# Altium PCB RC_Receive_PCB.PcbDoc
Units mm, origin at the board's own origin, x right, y up, seen from the top; angles counter-clockwise.
Board outline 100 x 120 mm, 2 copper layers (Top Layer, Bottom Layer); 88 components, 93 nets, 306 pads, 54 vias.
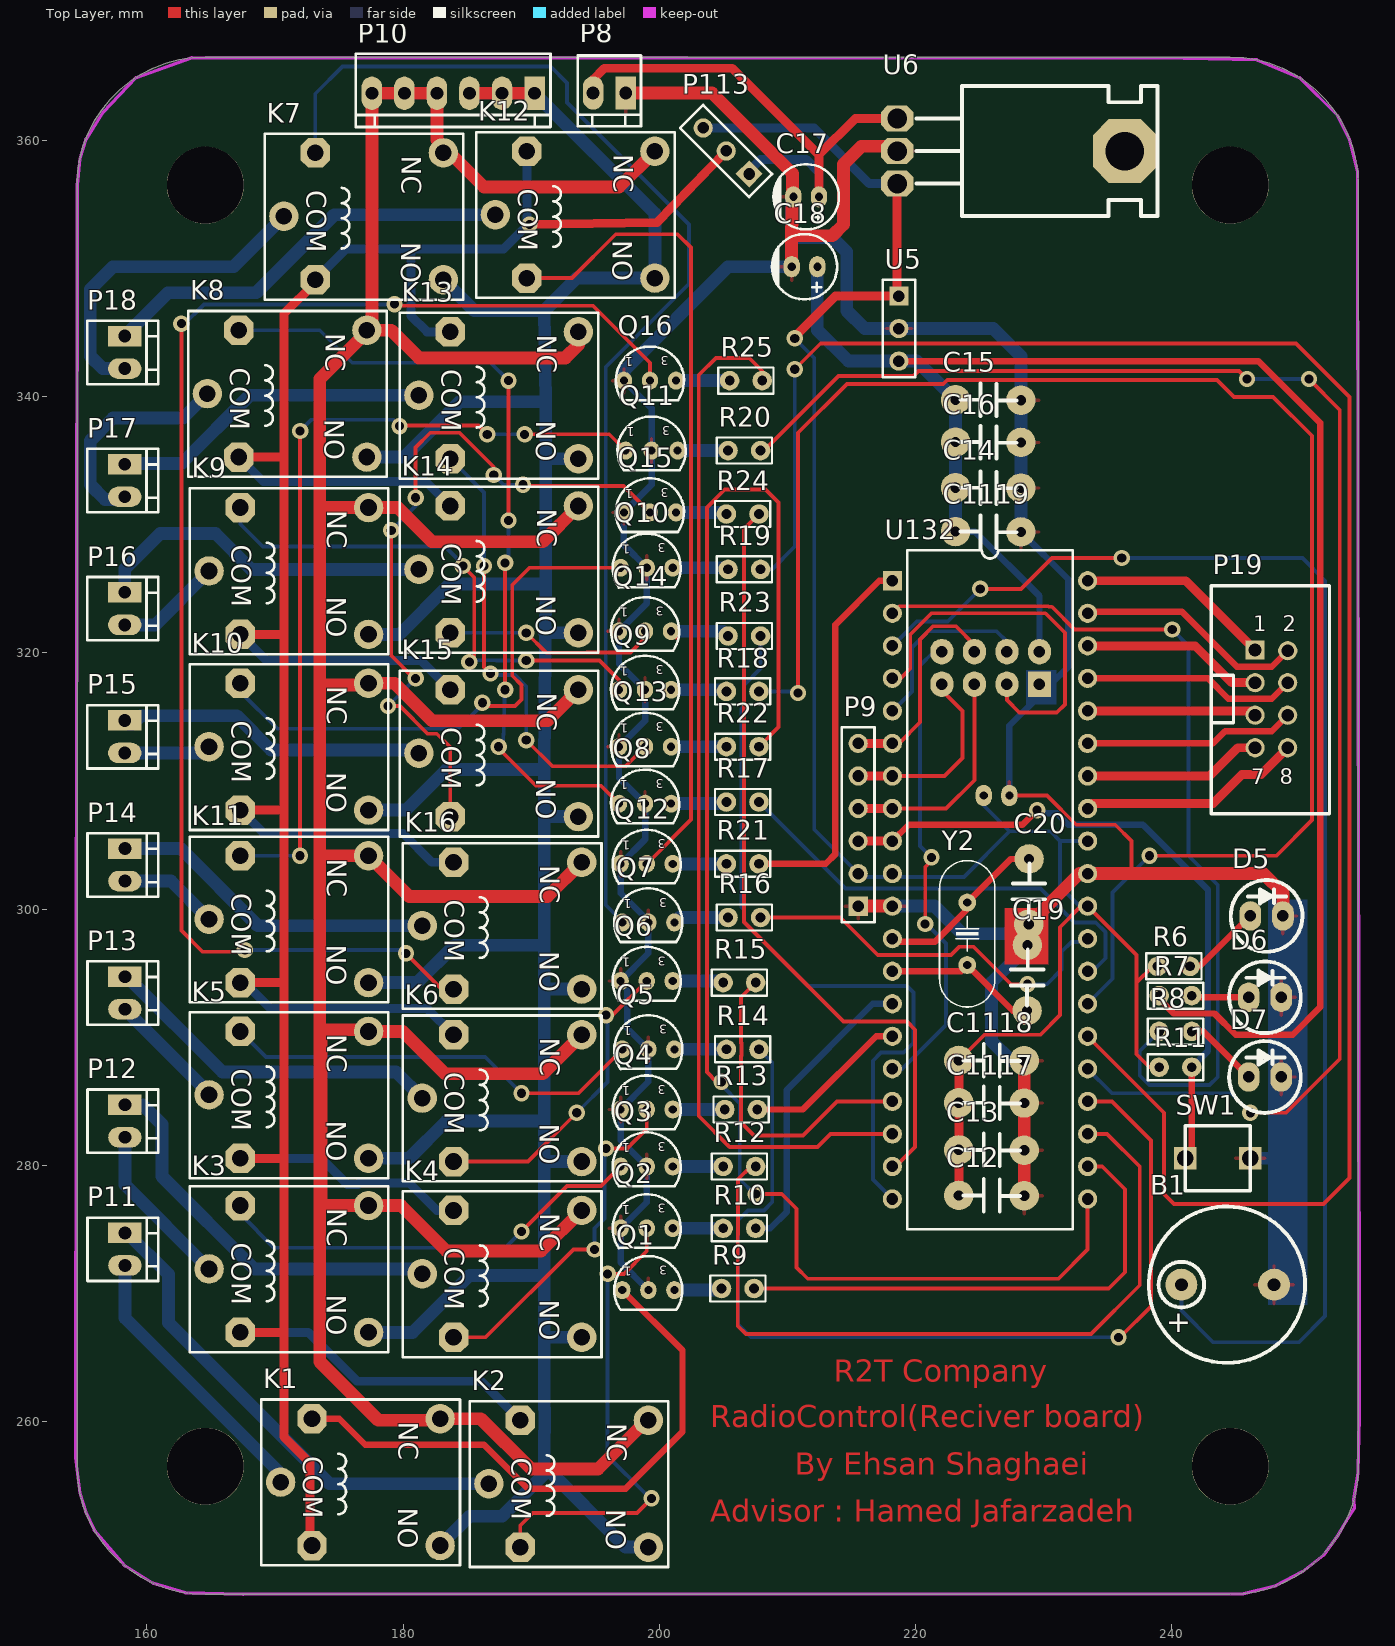
[diagram p0: Top Layer view]
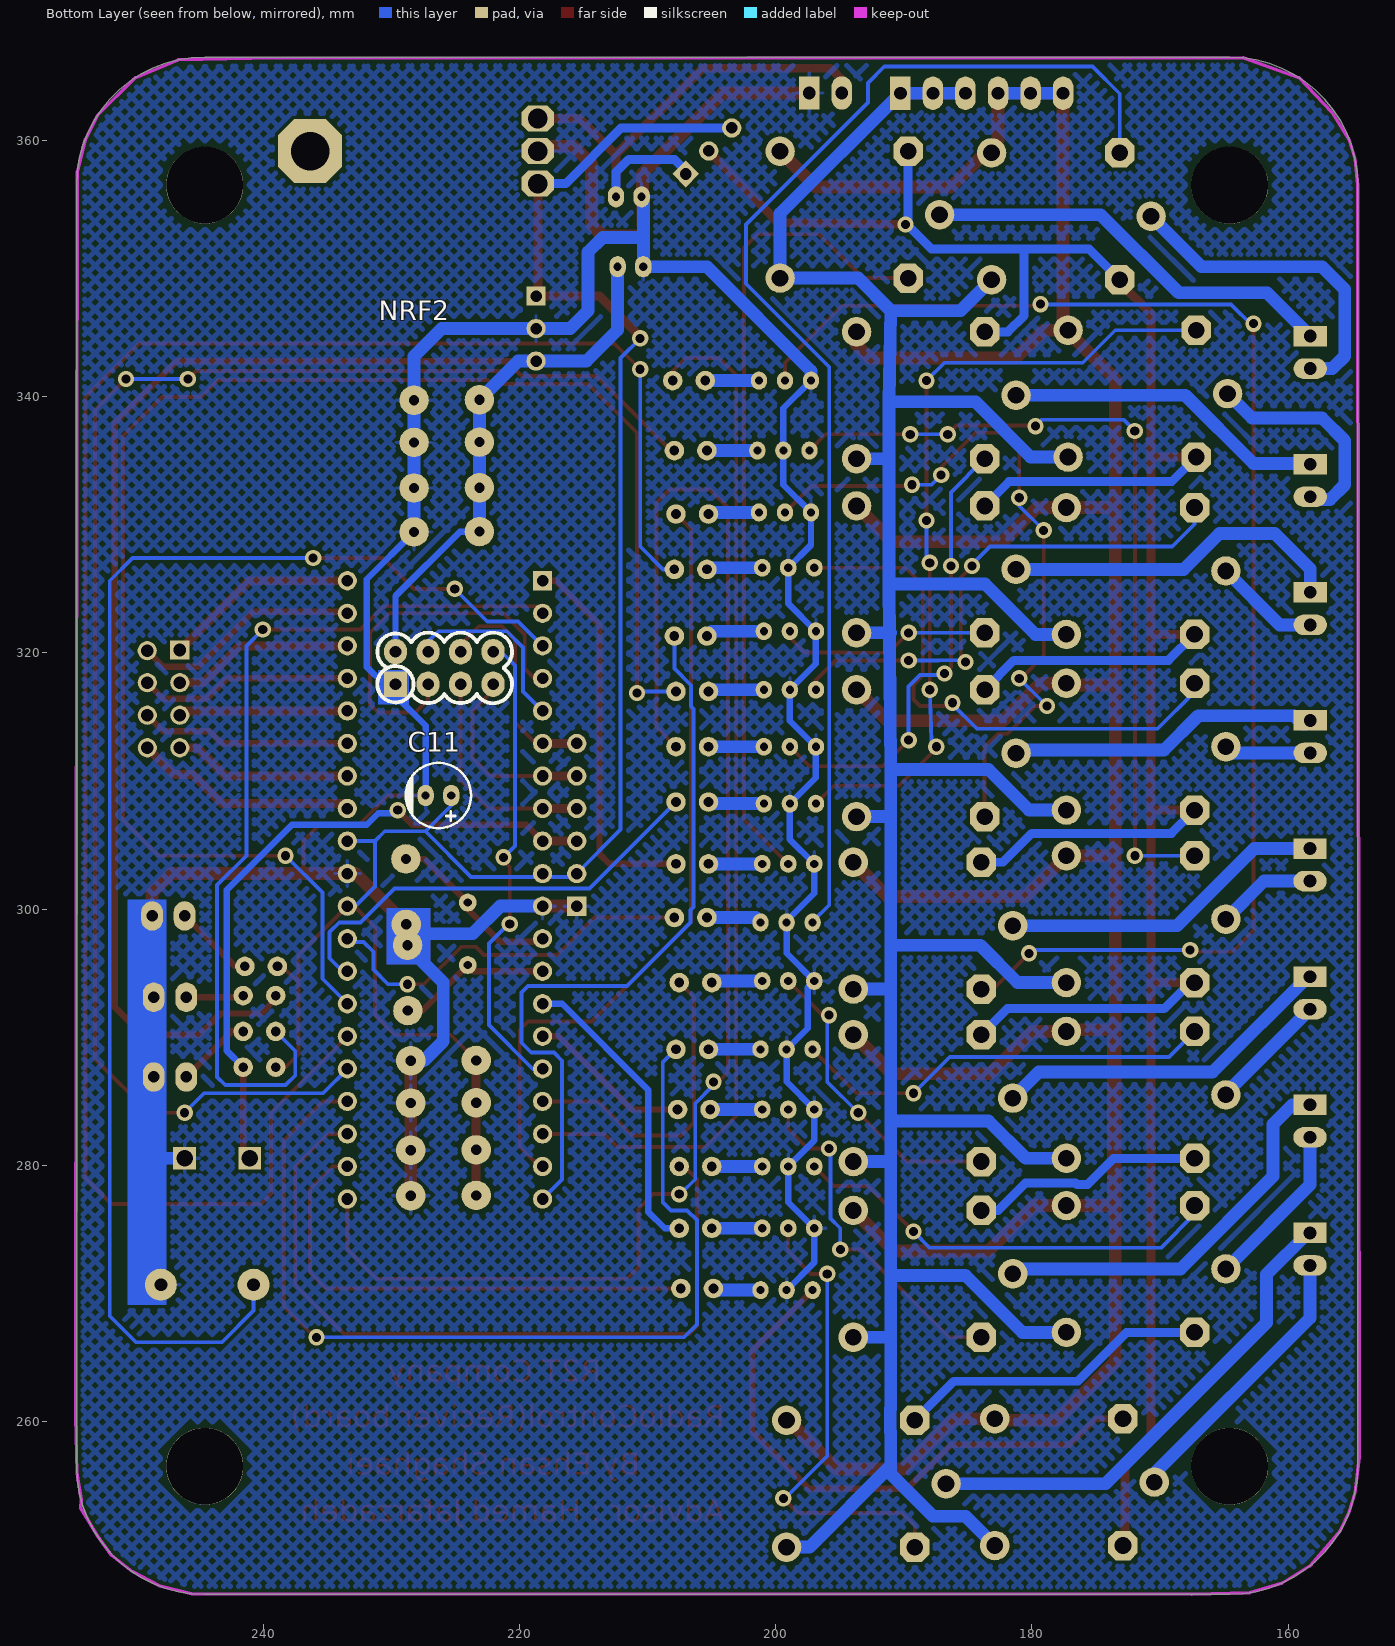
[diagram p1: Bottom Layer view, seen from below]
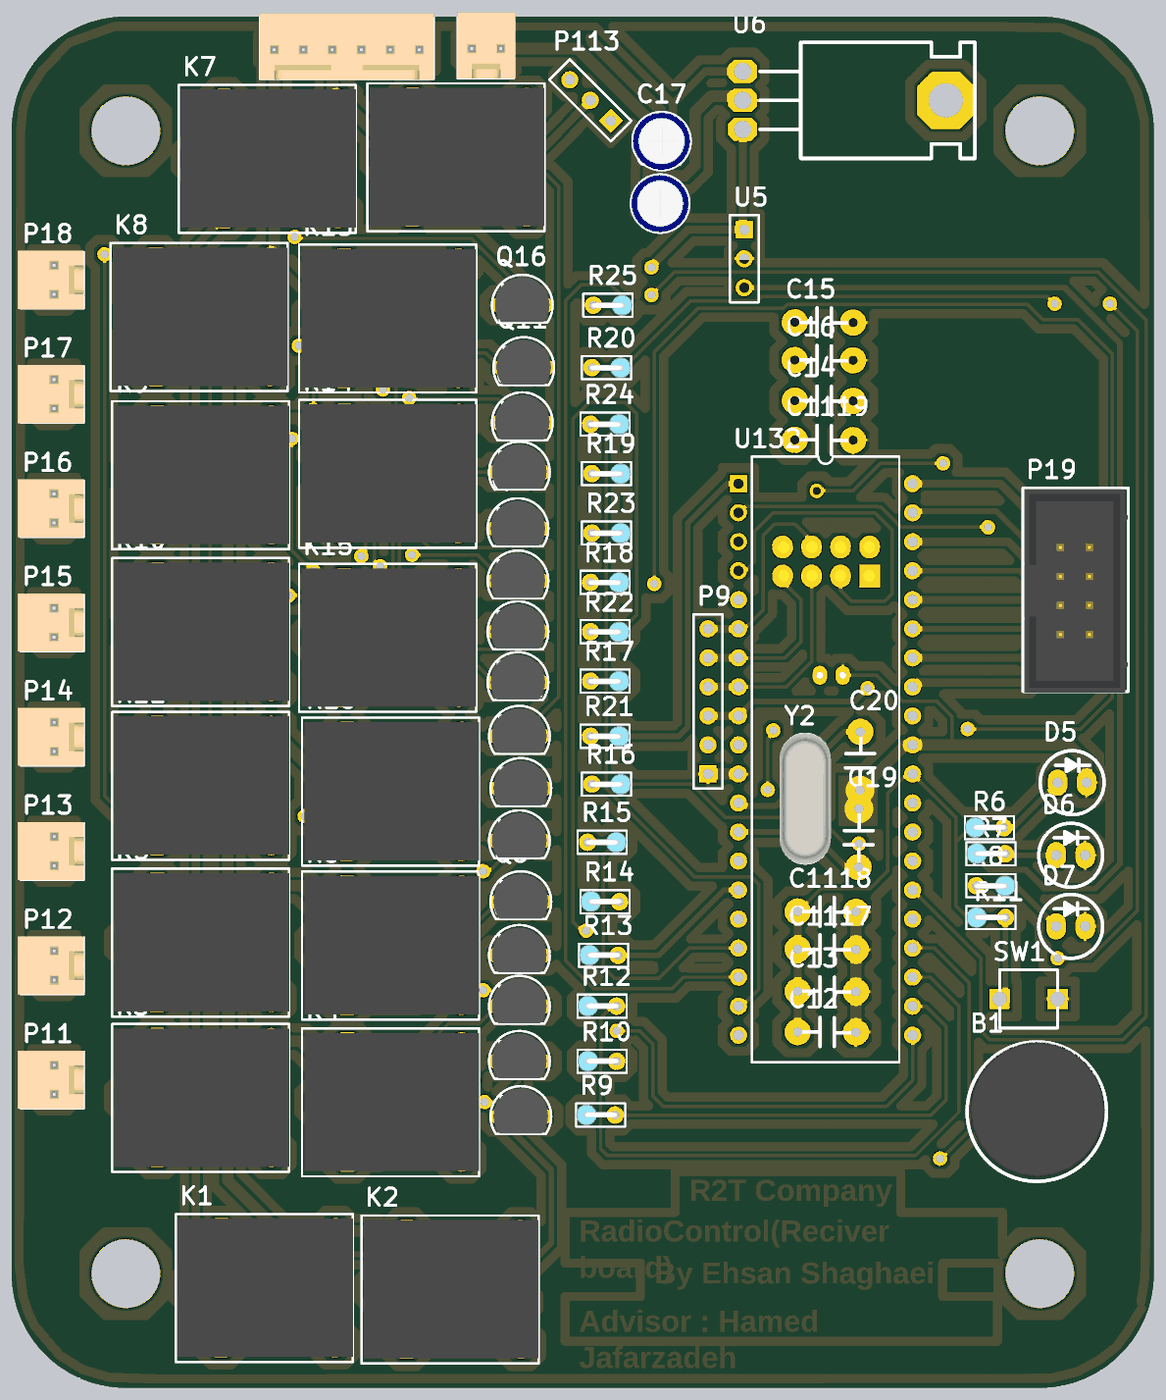
[diagram p2: 3D render of the assembled board from above, using the file's embedded part models]

## Layer stack, top to bottom
Top Solder: solder mask 0.0102, Solder Resist, Dk 3.5
Top Layer: signal copper 0.0356
Dielectric 1: dielectric 0.32, FR-4, Dk 4.8
Bottom Layer: signal copper 0.0356
Bottom Solder: solder mask 0.0102, Solder Resist, Dk 3.5

## Board outline
254.554,356.507 254.499,357.552 254.335,358.586 254.065,359.597 253.689,360.574 253.214,361.507 252.644,362.384 251.985,363.198 251.245,363.938 250.432,364.597 249.554,365.167 248.621,365.642 247.644,366.017 246.633,366.288 245.599,366.452 244.554,366.507 164.554,366.507 163.509,366.452 162.475,366.288 161.464,366.017 160.487,365.642 159.554,365.167 158.676,364.597 157.863,363.938 157.123,363.198 156.464,362.384 155.894,361.507 155.419,360.574 155.043,359.597 154.773,358.586 154.609,357.552 154.554,356.507 154.554,256.507 154.609,255.461 154.773,254.427 155.043,253.416 155.419,252.439 155.894,251.507 156.464,250.629 157.123,249.815 157.863,249.075 158.676,248.416 159.554,247.846 160.487,247.371 161.464,246.996 162.475,246.725 163.509,246.561 164.554,246.507 244.554,246.507 245.599,246.561 246.633,246.725 247.644,246.996 248.621,247.371 249.554,247.846 250.432,248.416 251.245,249.075 251.985,249.815 252.644,250.629 253.214,251.507 253.689,252.439 254.065,253.416 254.335,254.427 254.499,255.461 254.554,256.507

## Design rules (kind name [scope] priority, off if disabled: settings)
Clearance [All] p1: gap=0.254
PolygonConnect [All] p1: connectstyle=Relief reliefconductorwidth=0.254 reliefentries=4 polygonreliefangle="90 Angle" airgapwidth=0.254
RoutingVias [All] p1: holewidth=0.711 width=1.27 viastyle="Through Hole" minholewidth=0.711 minwidth=1.27 maxholewidth=0.711 maxwidth=1.27
SolderMaskExpansion [All] p1: expansion=0.102
Width [All] p1: maxlimit=1 minlimit=0.2 preferedwidth=0.5
29 further rules are at their usual default settings.

## Components (designator, comment, footprint, x,y, rotation, side; value= is the part's Value field where it differs from the comment)
B1 "Buzzer" Buzzer 244.602,270.383 r180 top
C11 "Value" "cap 01" 226.314,308.864 r180 bottom
C12 "CAP" RAD_ADA 228.473,277.622 r180 top
C13 "CAP" RAD_ADA 228.473,281.178 r180 top
C14 "CAP" RAD_ADA 228.219,332.867 r180 top
C15 "CAP" RAD_ADA 228.219,339.725 r180 top
C16 "CAP" RAD_ADA 228.219,336.423 r180 top
C17 "1uF" "cap 01" 211.455,355.6 r0 top
C18 "1uF" "cap 01" 211.328,350.139 r0 top
C19 "CAP" RAD_ADA 228.727,297.18 r270 top
C20 "CAP" RAD_ADA 228.854,303.911 r270 top
C1117 "CAP" RAD_ADA 228.473,284.861 r180 top
C1118 "CAP" RAD_ADA 228.473,288.163 r180 top
C1119 "CAP" RAD_ADA 228.219,329.438 r180 top
D5 "LED" LED_5MM 246.126,299.466 r180 top
D6 "LED" LED_5MM 245.999,293.116 r180 top
D7 "LED" LED_5MM 245.999,286.893 r180 top
K1 "Relay" "Relay 15.40x12.10x13.10" 170.434,255.27 r270 top
K2 "Relay" "Relay 15.40x12.10x13.10" 186.69,255.143 r270 top
K3 "Relay" "Relay 15.40x12.10x13.10" 164.846,271.907 r270 top
K4 "Relay" "Relay 15.40x12.10x13.10" 181.483,271.526 r270 top
K5 "Relay" "Relay 15.40x12.10x13.10" 164.846,285.496 r270 top
K6 "Relay" "Relay 15.40x12.10x13.10" 181.483,285.242 r270 top
K7 "Relay" "Relay 15.40x12.10x13.10" 170.688,354.076 r270 top
K8 "Relay" "Relay 15.40x12.10x13.10" 164.719,340.233 r270 top
K9 "Relay" "Relay 15.40x12.10x13.10" 164.846,326.39 r270 top
K10 "Relay" "Relay 15.40x12.10x13.10" 164.846,312.674 r270 top
K11 "Relay" "Relay 15.40x12.10x13.10" 164.846,299.212 r270 top
K12 "Relay" "Relay 15.40x12.10x13.10" 187.198,354.203 r270 top
K13 "Relay" "Relay 15.40x12.10x13.10" 181.229,340.106 r270 top
K14 "Relay" "Relay 15.40x12.10x13.10" 181.229,326.517 r270 top
K15 "Relay" "Relay 15.40x12.10x13.10" 181.229,312.166 r270 top
K16 "Relay" "Relay 15.40x12.10x13.10" 181.483,298.704 r270 top
NRF2 "NRF24L01+_Module" NRF24L01+_Module 225.298,318.516 r90 bottom
P8 "LHWR" "Polarized Header 2" 196.088,363.474 r180 top
P9 "Programmer" HDR1X6 215.519,300.228 r90 top
P10 "LHWR" "Polarized Header 6" 183.896,363.474 r180 top
P11 "LHWR" "Polarized Header 2" 158.508,273.444 r270 top
P12 "LHWR" "Polarized Header 2" 158.508,283.444 r270 top
P13 "LHWR" "Polarized Header 2" 158.508,293.444 r270 top
P14 "LHWR" "Polarized Header 2" 158.508,303.444 r270 top
P15 "LHWR" "Polarized Header 2" 158.496,313.444 r270 top
P16 "LHWR" "Polarized Header 2" 158.496,323.444 r270 top
P17 "LHWR" "Polarized Header 2" 158.496,333.444 r270 top
P18 "LHWR" "Polarized Header 2" 158.496,343.444 r270 top
P19 "Free ADC" "Box Header 2x4" 246.507,312.547 r0 top
P113 "Header 3" HDR1X3 207.01,357.378 r135 top
Q1 "C945" C945 199.136,270.256 r180 top
Q2 "C945" C945 199.009,275.082 r180 top
Q3 "C945" C945 199.009,279.908 r180 top
Q4 "C945" C945 199.009,284.353 r180 top
Q5 "C945" C945 199.136,289.052 r180 top
Q6 "C945" C945 199.009,294.386 r180 top
Q7 "C945" C945 199.136,298.958 r180 top
Q8 "C945" C945 198.882,308.229 r180 top
Q9 "C945" C945 198.882,317.119 r180 top
Q10 "C945" C945 199.009,326.644 r180 top
Q11 "C945" C945 199.39,335.788 r180 top
Q12 "C945" C945 199.009,303.53 r180 top
Q13 "C945" C945 198.882,312.674 r180 top
Q14 "C945" C945 198.882,321.691 r180 top
Q15 "C945" C945 199.263,330.962 r180 top
Q16 "C945" C945 199.263,341.249 r180 top
R6 "1K" Res-(1/4)-Stand 238.887,295.529 r0 top
R7 "1K" Res-(1/4)-Stand 239.014,293.243 r0 top
R8 "1K" Res-(1/4)-Stand 241.554,290.449 r180 top
R9 "1K" Res-(1/4)-Stand 204.851,270.383 r0 top
R10 "1K" Res-(1/4)-Stand 204.978,275.082 r0 top
R11 "1K" Res-(1/4)-Stand 239.014,287.655 r0 top
R12 "1K" Res-(1/4)-Stand 204.978,279.908 r0 top
R13 "1K" Res-(1/4)-Stand 205.105,284.353 r0 top
R14 "1K" Res-(1/4)-Stand 205.232,289.052 r0 top
R15 "1K" Res-(1/4)-Stand 207.518,294.259 r180 top
R16 "1K" Res-(1/4)-Stand 207.899,299.339 r180 top
R17 "1K" Res-(1/4)-Stand 207.772,308.356 r180 top
R18 "1K" Res-(1/4)-Stand 207.772,316.992 r180 top
R19 "1K" Res-(1/4)-Stand 207.899,326.517 r180 top
R20 "1K" Res-(1/4)-Stand 207.899,335.788 r180 top
R21 "1K" Res-(1/4)-Stand 207.772,303.53 r180 top
R22 "1K" Res-(1/4)-Stand 207.772,312.674 r180 top
R23 "1K" Res-(1/4)-Stand 207.899,321.31 r180 top
R24 "1K" Res-(1/4)-Stand 207.772,330.835 r180 top
R25 "1K" Res-(1/4)-Stand 208.026,341.249 r180 top
SW1 "SWITCH" SWITCH 243.586,280.543 r0 top
U5 "LF33" HDR1X3 218.694,347.853 r270 top
U6 "7805" My_TO-220 218.567,361.696 r270 top
U132 "ATmega16-16PC" 40P6 225.806,301.498 r270 top
Y2 "16Mhz" "XTAL Small" 224.028,298.069 r90 top

## Footprints (in the part's own frame and the unit in brackets; to place one, negate y for a bottom-side part, rotate by r counter-clockwise, add the part's x,y. Pads: shape width x height; smd on the part's side, far side on the other; paste and mask are expansions set on the pad)
40P6 [mm] "DIP; 40 Leads; Row Spacing 15.24 mm; Pitch 2.54 mm"
  rect 1.5x1.5 hole 0.9: 1(-24.13,-7.62)
  round 1.5 hole 0.9: 2(-21.59,-7.62) 3(-19.05,-7.62) 4(-16.51,-7.62) 5(-13.97,-7.62) 6(-11.43,-7.62) 7(-8.89,-7.62) 8(-6.35,-7.62) 9(-3.81,-7.62) 10(-1.27,-7.62) 11(1.27,-7.62) 12(3.81,-7.62) 13(6.35,-7.62) 14(8.89,-7.62) 15(11.43,-7.62) 16(13.97,-7.62) 17(16.51,-7.62) 18(19.05,-7.62) 19(21.59,-7.62) 20(24.13,-7.62) 21(24.13,7.62) 22(21.59,7.62) 23(19.05,7.62) 24(16.51,7.62) 25(13.97,7.62) 26(11.43,7.62) 27(8.89,7.62) 28(6.35,7.62) 29(3.81,7.62) 30(1.27,7.62) 31(-1.27,7.62) 32(-3.81,7.62) 33(-6.35,7.62) 34(-8.89,7.62) 35(-11.43,7.62) 36(-13.97,7.62) 37(-16.51,7.62) 38(-19.05,7.62) 39(-21.59,7.62) 40(-24.13,7.62)
  silkscreen extent -26.5,-6.45 26.5,6.45
"Box Header 2x4" [mm]
  rect 1.5x1.5 hole 1: 1(-0.006,7.666)
  round 1.5 hole 1: 2(2.54,7.62) 3(-0.006,5.126) 4(2.534,5.126) 5(-0.006,2.586) 6(2.534,2.586) 7(-0.006,0.046) 8(2.534,0.046)
  silkscreen extent -3.42,-5.1 5.8,12.7, body extent -3.3,-5.21 5.8,12.61, height 7.42
Buzzer [mm] "Magnetic Transducer"
  round 2.5 hole 1: 1(3.859,-0.297) 2(-3.38,-0.297)
  silkscreen extent -5.8,-6.4 6.4,5.8, body extent -5.67,-6.39 6.17,5.45, height 6.98
C945 [mil] "NPN Transistor"
  oval 50x55 hole 25: 1(80,0) 2(0,0) 3(-80,0)
  silkscreen extent -105,-105 105,61, body extent -94,-96 95,58, height 315
"cap 01" [mm]
  oval 1.27x1.651 hole 0.635: 1(1,0) 2(-1,0)
  silkscreen extent -2.55,-2.55 2.55,2.55, body extent -2.53,-2.53 2.53,2.53, height 12.54
HDR1X3 [mm] "Connector; Header; 3 Position"
  rect 1.5x1.5 hole 0.9: 1(0,0)
  round 1.5 hole 0.9: 2(2.54,0) 3(5.08,0)
  silkscreen extent -1.27,-1.27 6.35,1.27
HDR1X6 [mm] "Connector; Header; 6 Position"
  rect 1.5x1.5 hole 0.9: 1(0,0)
  round 1.5 hole 0.9: 2(2.54,0) 3(5.08,0) 4(7.62,0) 5(10.16,0) 6(12.7,0)
  silkscreen extent -1.27,-1.27 13.97,1.27
LED_5MM [mm]
  oval 1.7x2.3 hole 0.9: 1(0,0) 2(-2.54,0)
  silkscreen extent -4.07,-2.8 1.53,2.8
My_TO-220 [mil]
  oct 196.85x196.85 hole 118.11: 0(99.49,699.49)
  oct 80x100 hole 60: 1(-0.5,-0.5) 2(99.5,-0.5) 3(199.5,-0.5)
  silkscreen extent -101,60 299,800
NRF24L01+_Module [mm]
  rect 2x1.8 hole 0.9: 1(-0.965,4.369)
  oval 2x1.8 hole 0.9: 2(1.575,4.369) 3(-0.965,1.829) 4(1.575,1.829) 5(-0.965,-0.711) 6(1.575,-0.711) 7(-0.965,-3.251) 8(1.575,-3.251)
  silkscreen extent -2.45,-4.73 3.06,5.79, body extent -2.33,-9.08 26.67,5.92, height 9.1
"Polarized Header 2" [mm]
  rect 1.6x2.6 hole 1: 1(-1.28,-0.23)
  oval 1.6x2.6 hole 1: 2(1.26,-0.23)
  silkscreen extent -2.47,-3.15 2.48,2.37, body extent -2.57,-3.43 2.51,2.37, height 10.75
"Polarized Header 6" [mm]
  rect 1.6x2.6 hole 1: 1(-6.36,-0.205)
  oval 1.6x2.6 hole 1: 2(-3.82,-0.205) 3(-1.28,-0.205) 4(1.26,-0.205) 5(3.8,-0.205) 6(6.34,-0.205)
  silkscreen extent -7.6,-3.3 7.6,2.42, body extent -7.62,-3.32 7.62,2.48, height 10.75
RAD_ADA [mm]
  round 2.3 hole 0.8: 1(0,0) 2(5.105,-0.026)
  silkscreen extent 0.33,-1.3 4.72,1.24
"Relay 15.40x12.10x13.10" [mm]
  round 2.3 hole 1.3: 1(0,0) 2(-4.95,12.45) 3(4.95,12.45)
  oct 2.3x2.3 hole 1.3: 4(-4.95,2.45) 5(4.95,2.45)
  silkscreen extent -6.45,-1.5 6.5,14, body extent -6.05,-1.3 6.05,14, height 15.6
Res-(1/4)-Stand [mil]
  round 60 hole 30: 1(0,0) 2(100,0)
  silkscreen extent -35,-40 135,40, body extent -35,-35 111,37, height 287
SWITCH [mil]
  rect 70x70 hole 50: 1(100,0) 2(-100,0)
  silkscreen extent -100,-100 100,100
"XTAL Small" [mil]
  round 55 hole 25: 1(-96.06,0) 2(96.06,0)
  silkscreen extent -225,-85 225,85, body extent -226,-89 226,89, height 140

## Part data
C11 C17 C18: library part Cap-Polar, "Polar Capacitor"
K1 K2 K3 K4 K5 K6 K7 K8 K9 K10 K11 K12 K13 K14 K15 K16: "SPDT Relay"
P8 P11 P12 P13 P14 P15 P16 P17 P18: library part "2pin LHWR"
P9: library part "Header 6", "Header, 6-Pin"
P10: library part "6pin LHWR"
P19: library part "BoxHeader 2x4"
P113: "Header, 3-Pin"
Q1 Q2 Q3 Q4 Q5 Q6 Q7 Q8 Q9 Q10 Q11 Q12 Q13 Q14 Q15 Q16: "NPN Transistor"
R6 R7 R8 R9 R10 R11 R12 R13 R14 R15 R16 R17 R18 R19 R20 R21 R22 R23 R24 R25: library part Resistor, "Resistor"
U5: library part "Header 3", "Header, 3-Pin"
U6: "Regulator"
U132: "8-Bit AVR Microcontroller with 16K Bytes of In-System Programmable Flash Memory"
Y2: library part XTAL, "XTAL Crystal"

## Free pads (board coordinates)
  round 6 hole 6: 1(164.554,256.507) 1(164.554,356.507) 1(244.554,256.507) 1(244.554,356.507)

## Via types
v1: diameter 1.27, hole 0.711, Top Layer to Bottom Layer, 54 vias

## Nets (pads, with @x,y where several pads share a name; then routed paths per layer and width w, separated by ;. In a path a pad name is that pad's centre, name@x,y a point inside that pad or via, vN(x,y) a via of type N, cw(c..) or ccw(c..) an arc to the next point about the centre after c; other vN are vias at no path point)
+12: C17.1 P8.2 P113.1 U6.1 | length 40.8
  Top Layer w0.7: P8.2 194.828,364.754 195.707,365.633 205.686,365.633 212.455,358.864 ; C17.1 212.455,358.864 ; U6.1 215.3,361.709 212.455,358.864
  Bottom Layer w0.7: P113.1 207.01,357.632 207.899,358.521 211.455,358.521 212.455,357.521 C17.1
ADC0: P19.1 U132.40 | length 15.3
  Top Layer w0.7: U132.40 241.086,325.628 P19.1
ADC1: P19.2 U132.39 | length 18
  Top Layer w0.5: U132.39 233.553,323.215 240.792,323.215 245.08,318.927 247.807,318.927 P19.2
ADC2: P19.3 U132.38 | length 14.3
  Top Layer w0.7: U132.38 241.808,320.548 244.683,317.673 P19.3
ADC3: P19.4 U132.37 | length 16.8
  Top Layer w0.5: U132.37 242.824,318.008 244.413,316.419 247.787,316.419 P19.4
ADC4: P19.5 U132.36 | length 12.7
  Top Layer w0.7: U132.36 P19.5@246.166,315.468
ADC5: P19.6 U132.35 | length 16.5
  Top Layer w0.5: U132.35 243.205,312.928 244.156,313.879 247.787,313.879 P19.6
ADC6: P19.7 U132.34 | length 14
  Top Layer w0.7: U132.34 242.951,310.388 245.156,312.593 P19.7
ADC7: P19.8 U132.33 | length 17.6
  Top Layer w0.7: U132.33 233.807,308.229 243.205,308.229 245.491,310.515 246.963,310.515 P19.8
CE: NRF2.3 U132.4 | length 29.8
  Top Layer w0.3: U132.4 218.821,318.008 219.583,318.77 219.583,321.437 221.234,323.088 230.124,323.088 231.648,321.564 231.648,315.976 231.013,315.341 228.092,315.341 227.127,316.306 NRF2.3
CNC1: R10.2 U132.14 | length 23.5
  Bottom Layer w0.5: R10.2 208.661,275.082 209.931,276.352 209.931,285.877 216.662,292.608 U132.14
CNC2: R13.2 U132.15 | length 12.9
  Top Layer w0.5: R13.2 211.201,284.353 216.916,290.068 U132.15
CNC3: R15.1 U132.17 | length 24.8
  Top Layer w0.3: R15.1 206.375,293.116 206.375,289.558 206.398,289.535 206.398,288.569 206.375,288.546 206.375,283.337 207.391,282.321 211.201,282.321 213.868,284.988 U132.17
CNC4: R25.1 U132.18 | length 81.1
  Top Layer w0.3: R25.1 208.026,342.011 207.01,343.027 204.412,343.027 203.073,341.688 203.073,283.845 205.486,281.432 212.344,281.432 213.36,282.448 U132.18
CNC5: R24.1 U132.19 | length 60.7
  Top Layer w0.3: R24.1 206.606,329.669 206.606,298.983 214.367,291.222 219.318,291.222 219.964,290.576 219.964,281.432 218.44,279.908 U132.19
CNC6: R23.1 U132.20 | length 57.7
  Bottom Layer w0.3: R23.1 207.899,318.768 206.606,317.475 206.606,315.826 206.398,315.618 206.398,300.157 206.629,299.926 206.629,298.96 211.595,293.994 218.664,293.994 218.675,294.005 219.329,294.005 219.837,293.497 219.837,289.56 219.075,288.798 217.297,288.798 216.662,288.163 216.662,278.892 U132.20
CNC7: R22.1 U132.21 | length 117.9
  Top Layer w0.3: v1(204.851,286.512) 204.47,286.512 203.708,287.274 203.708,331.343 205.105,332.74 208.28,332.74 209.296,331.724 209.296,314.198 R22.1 ; v1(207.518,277.749) 209.55,277.749 210.693,276.606 210.693,272.034 211.582,271.145 231.14,271.145 233.426,273.431 U132.21
  Bottom Layer w0.3: v1(204.851,286.512) 204.851,286.256 206.271,284.836 206.271,278.915 207.437,277.749 v1(207.518,277.749)
CNC8: R21.1 U132.1 | length 30.1
  Top Layer w0.5: R21.1 212.979,303.53 213.741,304.292 213.741,322.199 217.17,325.628 U132.1
CPC1: R9.2 U132.22 | length 39.6
  Top Layer w0.3: R9.2 235.077,270.383 236.347,271.653 236.347,278.13 234.569,279.908 U132.22
CPC2: R12.2 U132.23 | length 60.8
  Top Layer w0.3: R12.2 207.137,279.908 206.144,278.915 206.144,274.576 206.121,274.553 206.121,267.462 206.756,266.827 233.68,266.827 237.49,270.637 237.49,279.908 234.95,282.448 U132.23
CPC3: R14.2 U132.24 | length 77.5
  Top Layer w0.3: U132.24 235.331,284.988 238.379,281.94 238.379,268.986 235.966,266.573 v1(235.839,266.573)
  Bottom Layer w0.3: R14.2 208.811,288.013 208.811,277.137 208.153,276.479 206.906,276.479 206.144,275.717 206.144,267.566 207.137,266.573 v1(235.839,266.573) v1@236.22,266.573 ; U132.24 U132.24@233.807,284.607
CPC4: R20.1 U132.25 | length 122.7
  Top Layer w0.3: R20.1 208.153,335.788 213.984,341.619 219.826,341.619 220.218,342.011 245.237,342.011 v1(245.872,341.376) ; v1(246.126,284.099) 248.92,284.099 253.111,288.29 253.111,338.963 v1(250.698,341.376)
  Bottom Layer w0.3: U132.25 235.331,285.623 244.602,285.623 v1(246.126,284.099) v1@246.253,283.972 ; v1(245.872,341.376) v1(250.698,341.376)
CPC5: R19.1 U132.26 | length 154.5
  Top Layer w0.3: v1(210.566,342.138) 212.598,344.17 212.609,344.159 249.693,344.159 253.873,339.979 253.873,279.019 251.841,276.987 240.157,276.987 239.395,277.749 239.395,284.099 U132.26
  Bottom Layer w0.3: R19.1 208.788,326.517 210.566,328.295 v1(210.566,342.138)
CPC6: R18.1 U132.27 | length 124.4
  Top Layer w0.3: v1(210.82,316.865) 210.82,337.185 214.63,340.995 222.16,340.995 222.47,341.305 243.53,341.305 244.856,339.979 247.904,339.979 250.933,336.95 250.933,306.94 248.158,304.165 v1(238.252,304.165)
  Bottom Layer w0.3: R18.1 210.693,316.992 v1(210.82,316.865) ; U132.27 235.377,294.559 235.377,301.29 v1(238.252,304.165)
CPC7: R17.1 U132.28 | length 35.1
  Bottom Layer w0.3: R17.1 214.517,301.611 229.757,301.611 232.41,298.958 234.061,298.958 234.823,298.196 234.823,296.164 233.807,295.148 U132.28
CPC8: R16.1 U132.29 | length 30.9
  Top Layer w0.3: R16.1 214.122,299.339 217.043,296.418 222.758,296.418 223.393,297.053 224.536,297.053 227.457,294.132 v1(228.727,294.132)
  Bottom Layer w0.3: v1(228.727,294.132) 228.727,293.878 228.981,294.132 230.251,294.132 231.394,295.275 231.394,296.672 232.156,297.434 233.172,297.434 U132.29
CSN: NRF2.4 U132.5 | length 14.7
  Bottom Layer w0.3: U132.5 219.71,316.992 219.71,320.421 220.98,321.691 226.314,321.691 227.127,320.878 NRF2.4
GND: B1.2 C11.2 C12.1 C13.1 C14.1 C15.1 C16.1 C17.2 C18.2 C19.1 C20.2 C1117.1 C1118.1 C1119.1 D5.2 D6.2 D7.2 NRF2.1 P8.1 P9.1 Q1.2 Q2.1 Q3.2 Q4.1 Q5.2 Q6.1 Q7.2 Q8.2 Q9.2 Q10.2 Q11.2 Q12.1 Q13.1 Q14.1 Q15.1 Q16.1 SW1.1 U5.2 U6.2 U132.11 U132.31 | length 314.1
  Top Layer w0.3: C11.2 230.251,308.864 232.537,306.578 235.585,306.578 236.855,305.308 236.855,303.022
  Top Layer w1: P8.1 204.113,363.704 210.392,357.425 210.392,355.602 210.312,352.552 ; C18.2@210.312,350.012 210.312,352.552 ; P9.1 U132.11 ; U6.2 218.186,359.537 215.773,359.537 214.376,358.14 214.376,353.441 213.487,352.552 210.312,352.552 ; C12.1 C13.1 C1117.1 C1118.1 ; C19.1@228.828,297.281 C20.2 232.79,302.768 U132.31 247.142,302.768 248.666,301.244 D5.2
  Bottom Layer w0.5: Q16.1 199.39,339.09 Q11.2 199.39,333.121 Q15.1 197.231,328.422 Q10.2 199.009,323.85 Q14.1 196.85,319.151 Q9.2 198.882,314.706 Q13.1 196.85,310.261 Q8.2 198.882,305.435 Q12.1 196.977,301.244 199.136,299.085 Q7.2 199.136,296.545 Q6.1 197.485,293.878 197.485,290.703 Q5.2 199.136,286.512 Q4.1 196.977,281.94 Q3.2 199.009,277.114 Q2.1 196.977,272.415 Q1.2 ; C11.2 227.314,314.309 229.667,316.662 NRF2.1 230.556,317.551 231.902,318.897 231.902,325.755 C1119.1
  Bottom Layer w1: Q16.1 197.231,342.011 205.359,350.139 C18.2 ; C18.2@210.312,350.377 210.312,352.425 ; C17.2 210.312,355.457 210.312,352.425 ; U132.11 221.488,300.228 223.647,298.069 228.091,298.069 C20.2 ; C1119.1 C14.1 C16.1 C15.1 228.219,343.154 226.06,345.313 U5.2 216.027,345.313 214.63,346.71 214.63,351.282 213.487,352.425 210.312,352.425 ; C1118.1 227.457,288.163 225.933,289.687 225.933,294.259 228.727,297.053 C19.1 ; SW1.1 248.285,280.543 ; B1.2 248.539,271.237 D7.2 248.666,287.02 D5.2 ; 248.793,280.289 249.936,280.289
IRQ: NRF2.8 U132.16 | length 37.1
  Top Layer w0.3: v1(220.747,298.839) 220.747,303.297 221.234,303.784 v1(221.234,304.038)
  Bottom Layer w0.3: U132.16 218.948,287.528 222.377,290.957 222.377,297.307 220.845,298.839 v1(220.747,298.839) ; v1(221.234,304.038) 220.345,304.927 220.345,319.024 221.412,320.091 NRF2.8
MISO: NRF2.7 P9.5 U132.7 | length 15.1
  Top Layer w0.3: U132.7 222.25,310.388 223.647,311.785 223.647,315.468 222.047,317.068 NRF2.7
  Top Layer w0.7: P9.5 U132.7
MN1: K2.1 P11.1 | length 38.7
  Bottom Layer w1: P11.1 158.436,274.724 161.671,271.489 161.671,267.716 174.244,255.143 K2.1
MN2: K4.1 P12.1 | length 30.5
  Bottom Layer w1: P12.1 159.649,284.724 161.163,283.21 161.163,279.146 168.402,271.907 K4.1@181.102,271.907
MN3: K6.1 P13.1 | length 27.1
  Bottom Layer w1: P13.1 158.436,294.724 165.886,287.274 179.451,287.274 K6.1
MN4: K16.1 P14.1 | length 25.7
  Bottom Layer w1: P14.1 162.636,304.724 168.656,298.704 K16.1
MN5: K15.1 P15.1 | length 24.5
  Bottom Layer w1: P15.1 158.538,314.452 158.878,314.452 159.513,315.087 167.005,315.087 169.672,312.42 180.975,312.42 K15.1
MN6: K14.1 P16.1 | length 27.1
  Bottom Layer w1: P16.1 158.266,326.541 161.036,329.311 165.354,329.311 168.148,326.517 K14.1
MN7: K13.1 P17.1 | length 25.2
  Bottom Layer w1: P17.1 158.314,334.772 162.687,334.772 168.021,340.106 K13.1
MN8: K12.1 P18.1 | length 32.9
  Bottom Layer w1: P18.1 161.649,348.107 168.529,348.107 174.625,354.203 K12.1
MOSI: NRF2.6 P9.6 U132.6 | length 17.8
  Top Layer w0.3: U132.6 218.694,312.928 220.345,314.579 220.345,321.056 221.361,322.072 223.139,322.072 224.587,320.624 NRF2.6
  Top Layer w0.7: P9.6 U132.6
MOTOR_SUPPLY+: K1.2 K2.2 K3.2 K4.2 K5.2 K6.2 K7.2 K8.2 K9.2 K10.2 K11.2 K12.2 K13.2 K14.2 K15.2 K16.2 P10.4 P10.5 P10.6 | length 310.6
  Top Layer w1: 173.612,331.34 K9.2 179.581,331.34 182.245,328.676 190.888,328.676 K14.2 ; 173.739,304.162 K11.2 180.468,300.99 191.269,300.99 K16.2 ; K5.2@177.166,290.576 177.169,290.573 173.612,290.573 173.612,276.857 K3.2 179.835,276.857 183.388,273.304 190.761,273.304 K4.2 ; K8.2 K8.2@177.289,345.183 ; K5.2 179.962,290.446 183.261,287.147 190.888,287.147 K6.2 ; K1.2@182.76,260.096 178.054,260.096 173.482,264.668 173.482,317.5 ; K1.2 186.058,260.22 189.992,256.286 195.199,256.286 198.759,259.846 K2.2@198.759,260.22 ; K15.2 191.269,314.706 182.245,314.706 179.327,317.624 K10.2 177.172,317.5 173.482,317.5 ; K13.2 193.679,344.047 192.659,343.027 181.229,343.027 179.073,345.183 K8.2@177.289,345.183 ; K12.2 196.857,356.362 186.309,356.362 182.636,360.035 P10.4 P10.5 P10.6 177.556,345.45 K8.2@177.289,345.183 ; 173.482,317.5 173.482,341.376 K8.2@177.289,345.183
  Bottom Layer w1: P10.6 P10.5 P10.4
MOTOR_SUPPLY-: K1.3 K2.3 K3.3 K4.3 K5.3 K6.3 K7.3 K8.3 K9.3 K10.3 K11.3 K12.3 K13.3 K14.3 K15.3 K16.3 P10.1 P10.2 P10.3 | length 266.5
  Top Layer w1: P10.3 P10.2 P10.1
  Bottom Layer w1: K8.3 180.089,335.283 184.404,339.598 191.135,339.598 ; K3.3 180.724,266.957 185.166,271.399 190.5,271.399 ; K5.3 180.47,280.546 183.388,283.464 191.008,283.464 ; K11.3 181.105,294.262 184.023,297.18 190.881,297.18 ; K10.3 180.216,307.724 183.388,310.896 191.008,310.896 ; K9.3 179.708,321.44 183.642,325.374 191.135,325.374 ; K1.3 185.167,252.603 187.706,252.603 191.008,255.905 191.008,259.17 191.044,259.206 191.044,260.98 191.008,261.016 191.008,283.464 ; K7.3 185.554,346.71 191.008,346.71 ; P10.3 P10.2 P10.1 199.648,354.287 K12.3 193.551,349.253 191.008,346.71 ; 191.008,256.54 197.355,250.193 K2.3 ; 191.011,266.576 K4.3 ; 191.011,280.292 K6.3 ; 191.011,321.567 K14.3 ; 191.138,335.156 K13.3 ; 191.265,307.216 K15.3 ; K16.3 191.008,293.754 ; 191.008,283.464 191.008,293.754 ; 191.008,293.754 191.008,310.896 ; 191.008,310.896 191.135,325.374 ; 191.008,346.71 191.135,339.598 ; 191.135,325.374 191.135,339.598
MP1: K1.1 P11.2 | length 21.9
  Bottom Layer w1: P11.2 158.278,268.092 170.434,255.936 K1.1
MP2: K3.1 P12.2 | length 13
  Bottom Layer w1: P12.2 158.278,278.475 K3.1
MP3: K5.1 P13.2 | length 9.4
  Bottom Layer w1: P13.2 164.846,285.616 K5.1
MP4: K11.1 P14.2 | length 7.8
  Bottom Layer w1: P14.2 161.874,302.184 K11.1
MP5: K10.1 P15.2 | length 6.1
  Bottom Layer w1: P15.2 K10.1@164.356,312.184
MP6: K9.1 P16.2 | length 8.3
  Bottom Layer w1: P16.2 160.64,322.184 K9.1
MP7: K8.1 P17.2 | length 17.1
  Bottom Layer w1: P17.2@158.06,331.978 156.718,331.978 155.575,333.121 155.575,336.55 157.353,338.328 162.814,338.328 K8.1
MP8: K7.1 P18.2 | length 25.8
  Bottom Layer w1: P18.2 156.545,342.184 155.575,343.154 155.575,348.361 157.353,350.139 166.751,350.139 K7.1
NetB1_1: B1.1 U132.3 | length 109.9
  Top Layer w0.3: v1(225.044,324.993) 227.497,324.993 228.219,324.993 230.632,327.406 v1(236.093,327.406)
  Bottom Layer w0.3: U132.3 220.091,322.453 222.504,322.453 v1(225.044,324.993) ; v1(236.093,327.406) 250.19,327.406 251.968,325.628 251.968,268.224 249.936,266.192 243.205,266.192 240.743,268.654 B1.1
NetC19_2: C19.2 U132.13 Y2.1 | length 12.2
  Top Layer w0.5: U132.13 223.547,295.148 Y2.1 227.582,292.075 C19.2
NetC20_1: C20.1 U132.12 Y2.2 | length 13.8
  Top Layer w0.5: U132.12 218.44,297.434 221.488,297.434 224.028,299.974 Y2.2 227.43,303.911 C20.1
NetD5_1: D5.1 R6.2 | length 6.3
  Top Layer w0.5: R6.2 242.189,295.529 D5.1
NetD6_1: D6.1 R7.2 | length 4.3
  Top Layer w0.5: R7.2@241.681,293.116 D6.1
NetD7_1: D7.1 R8.1 | length 5.9
  Top Layer w0.5: R8.1 242.443,290.449 D7.1
NetK1_4: K1.4 Q1.1 | length 46
  Top Layer w0.5: K1.4 175.009,260.22 177.038,258.191 186.309,258.191 189.738,254.762 197.358,254.762 201.803,259.207 201.803,265.557 Q1.1
NetK2_5: K2.5 Q2.2 | length 36.9
  Top Layer w0.3: K2.5 189.14,251.878 190.119,252.857 198.247,252.857 v1@199.263,253.873 ; v1(195.961,271.526) 197.231,271.526 199.009,273.304 Q2.2
  Bottom Layer w0.3: v1(195.961,271.526) 195.961,257.302 199.009,254.254 v1@199.136,254.254
  other v1: 199.39,254
NetK3_4: K3.4 Q3.1 | length 34.1
  Top Layer w0.3: v1(189.23,274.828) 192.786,278.384 195.453,278.384 Q3.1
  Bottom Layer w0.3: K3.4 167.296,276.188 169.926,273.558 187.96,273.558 v1(189.23,274.828)
NetK4_5: K4.5 Q4.2 | length 27.4
  Top Layer w0.3: K4.5 186.439,266.576 193.294,273.431 v1(194.945,273.431) ; v1(195.834,281.305) 197.485,281.305 199.009,282.829 Q4.2
  Bottom Layer w0.3: v1(194.945,273.431) 194.945,275.082 195.707,275.844 195.707,281.178 v1(195.834,281.305)
NetK5_4: K5.4 Q5.1 | length 33.2
  Top Layer w0.3: v1(189.23,285.623) 193.675,285.623 Q5.1
  Bottom Layer w0.3: K5.4 169.291,288.451 186.402,288.451 v1(189.23,285.623)
NetK6_5: K6.5 Q6.2 | length 24.4
  Top Layer w0.3: K6.5 189.741,280.292 v1(193.548,284.099) ; v1(195.834,291.719) 196.342,291.719 Q6.2
  Bottom Layer w0.3: v1(193.548,284.099) 195.961,286.512 195.961,291.846 v1(195.834,291.719)
NetK7_4: K7.4 Q7.1 | length 98.3
  Bottom Layer w0.3: K7.4 173.138,363.638 175.26,365.76 191.516,365.76 192.786,364.49 192.786,362.966 202.311,353.441 202.311,348.808 195.811,342.308 195.811,300.319 Q7.1@197.104,299.026
NetK8_4: K8.4 Q8.1 | length 63.8
  Top Layer w0.3: v1@187.135,312.864 190.373,309.626 195.453,309.626 Q8.1 ; v1(187.96,317.119) 187.96,324.485 v1(187.96,327.025) ; v1(188.214,330.327) v1(188.214,341.249)
  Bottom Layer w0.3: K8.4 173.485,345.183 176.022,342.646 186.817,342.646 v1(188.214,341.249) ; v1(187.452,312.674) 187.815,313.013 187.96,317.373 v1(187.96,317.119) ; v1(187.96,327.025) 188.214,327.025 v1(188.214,330.327)
NetK9_4: K9.4 Q9.1 | length 41.5
  Top Layer w0.3: v1(184.658,326.771) 185.547,325.882 185.547,319.278 v1(185.166,319.278) ; v1(189.611,319.405) 195.326,319.405 196.85,317.881 Q9.1
  Bottom Layer w0.3: K9.4 167.296,330.036 169.037,328.295 183.261,328.295 184.658,326.898 v1(184.658,326.771) ; v1(185.166,319.278) 185.316,319.428 187.247,319.428 187.27,319.405 v1(189.611,319.405)
NetK10_4: K10.4 Q10.1 | length 43.3
  Top Layer w0.3: v1(186.182,316.103) 186.436,315.849 188.722,315.849 189.23,316.357 189.23,317.5 188.514,318.216 188.514,325.293 189.865,326.644 Q10.1
  Bottom Layer w0.3: K10.4 167.296,316.955 170.18,314.071 184.277,314.071 186.182,315.976 v1(186.182,316.103)
NetK11_4: K11.4 Q11.1 | length 64.6
  Top Layer w0.3: v1(171.952,304.165) 171.952,336.925 171.958,336.931 v1(171.958,337.312) ; v1(179.705,337.693) 179.751,337.739 185.882,337.739 v1(186.563,337.058) ; v1(189.484,337.058) 196.088,337.058 Q11.1
  Bottom Layer w0.3: K11.4 171.955,304.162 v1(171.952,304.165) ; v1(171.958,337.312) 172.847,338.201 179.197,338.201 v1(179.705,337.693) ; v1(186.563,337.058) v1(189.484,337.058)
NetK12_5: K12.5 Q12.2 | length 64.2
  Top Layer w0.3: K12.5 193.17,349.253 196.596,352.679 201.422,352.679 202.461,351.64 202.461,306.982 Q12.2
NetK13_5: K13.5 Q13.2 | length 36.2
  Top Layer w0.3: v1(186.309,326.771) 186.309,318.897 v1(186.817,318.389) ; v1(189.611,313.182) 191.643,311.15 197.358,311.15 Q13.2
  Bottom Layer w0.3: K13.5 186.309,332.526 v1(186.309,326.771) ; v1(186.817,318.389) 186.944,318.262 188.722,318.262 189.611,317.373 v1(189.611,313.182)
NetK14_5: K14.5 Q14.2 | length 16.8
  Top Layer w0.3: v1(189.611,321.564) 191.162,320.013 194.323,320.013 194.35,320.04 197.739,320.04 198.882,321.183 Q14.2
  Bottom Layer w0.3: K14.5 189.354,321.567 189.357,321.564 v1(189.611,321.564)
NetK15_5: K15.5 Q15.2 | length 55.7
  Top Layer w0.3: v1(178.816,315.849) 179.744,315.849 181.903,313.69 182.626,313.69 183.679,312.637 K15.5 ; v1(179.07,329.565) 179.07,319.786 180.848,318.008 v1(180.975,318.008) ; v1(180.975,332.105) 180.975,336.042 182.118,337.185 184.404,337.185 187.071,334.518 v1(187.071,333.883) ; v1(189.357,333.121) 189.457,333.021 197.204,333.021 Q15.2
  Bottom Layer w0.3: v1@179.07,316.103 v1(180.975,318.008) ; v1(179.07,329.565) 180.975,331.47 v1(180.975,332.105) ; v1(187.071,333.883) 187.833,333.121 v1(189.357,333.121)
NetK16_5: K16.5 Q16.2 | length 111.7
  Top Layer w0.3: v1(162.687,345.694) 162.687,298.323 164.338,296.672 167.64,296.672 v1(167.64,296.799) ; v1(179.324,347.218) 179.197,347.091 194.818,347.091 199.263,342.646 Q16.2 ; v1(180.213,296.545) 183.004,293.754 K16.5
  Bottom Layer w0.3: v1(162.687,345.694) 162.814,345.567 164.45,347.203 179.309,347.203 v1(179.324,347.218) ; v1(167.64,296.799) 179.832,296.799 180.213,296.418 v1(180.213,296.545)
NetQ1_3: Q1.3 R9.1 | length 3.8
  Top Layer w0.5: Q1.3 Q1.3@201.422,270.256
  Bottom Layer w1: Q1.3 R9.1@204.724,270.256
NetQ2_3: Q2.3 R10.1 | length 3.9
  Bottom Layer w1: Q2.3 R10.1
NetQ3_3: Q3.3 R12.1 | length 3.9
  Bottom Layer w1: Q3.3 R12.1
NetQ4_3: Q4.3 R13.1 | length 4.1
  Bottom Layer w1: Q4.3 R13.1
NetQ5_3: Q5.3 R14.1 | length 4.1
  Bottom Layer w1: Q5.3 R14.1
NetQ6_3: Q6.3 R15.2 | length 3.8
  Bottom Layer w1: Q6.3 R15.2@204.851,294.386
NetQ7_3: Q7.3 R16.2 | length 4.2
  Top Layer w0.5: Q7.3 Q7.3@201.549,298.958
  Bottom Layer w1: Q7.3@201.549,299.339 R16.2
NetQ8_3: Q8.3 R17.2 | length 4.2
  Bottom Layer w1: Q8.3 R17.2@205.105,308.229
NetQ9_3: Q9.3 R18.2 | length 4.3
  Top Layer w0.5: Q9.3 Q9.3@201.041,317.119
  Bottom Layer w1: Q9.3 R18.2@205.105,317.119
NetQ10_3: Q10.3 R19.2 | length 4.2
  Bottom Layer w1: Q10.3 R19.2@205.232,326.644
NetQ11_3: Q11.3 R20.2 | length 3.9
  Bottom Layer w1: Q11.3 R20.2
NetQ12_3: Q12.3 R21.2 | length 4.2
  Bottom Layer w1: Q12.3 R21.2
NetQ13_3: Q13.3 R22.2 | length 4.3
  Bottom Layer w1: Q13.3 R22.2
NetQ14_3: Q14.3 R23.2 | length 4.6
  Top Layer w0.5: Q14.3 Q14.3@201.295,321.31
  Bottom Layer w1: Q14.3 R23.2@204.978,321.691
NetQ15_3: Q15.3 R24.2 | length 3.8
  Bottom Layer w1: Q15.3 R24.2@205.105,330.962
NetQ16_3: Q16.3 R25.2 | length 4.4
  Top Layer w0.5: Q16.3 Q16.3@201.549,341.249
  Bottom Layer w1: Q16.3 R25.2
NetR8_2: R8.2 U132.2 | length 70
  Top Layer w0.3: U132.2 218.74,323.642 230.353,323.642 230.399,323.596 230.632,323.596 232.41,321.818 v1(240.03,321.818)
  Bottom Layer w0.3: R8.2 237.49,288.925 237.49,287.02 238.252,286.258 242.951,286.258 243.586,286.893 243.586,301.879 241.3,304.165 241.3,320.548 v1(240.03,321.818)
RELAY_SUPPLY: K1.5 K2.4 K3.5 K4.4 K5.5 K6.4 K7.5 K8.5 K9.5 K10.5 K11.5 K12.4 K13.4 K14.4 K15.4 K16.4 P113.2 | length 286.4
  Top Layer w0.7: K8.5 170.558,335.283 ; K3.5 170.564,266.957 ; K5.5 170.685,280.546 ; K11.5 170.304,294.262 ; K10.5 170.177,307.724 ; K9.5 170.558,321.44 ; K1.5@172.72,250.484 172.72,256.794 170.688,258.826 170.688,346.456 173.138,348.906 K7.5 ; v1(189.865,353.441) 199.818,353.602 P113.2
  Bottom Layer w0.7: K8.5 169.077,333.375 181.771,333.375 K14.4@183.741,331.405 ; K3.5 172.59,266.957 176.403,263.144 186.089,263.144 K2.4 ; K5.5 173.606,280.546 175.641,278.511 176.469,278.511 176.569,278.611 180.494,278.611 182.629,276.476 K4.4 ; K11.5 167.637,294.262 169.672,292.227 181.898,292.227 K6.4 ; K10.5 169.104,305.916 179.986,305.916 182.248,303.654 K16.4 ; K9.5 169.331,319.405 181.39,319.405 K15.4 ; K7.5 175.548,351.536 187.833,351.536 189.648,353.351 K12.4 ; 180.594,351.409 180.594,346.329 181.867,345.056 K13.4 ; K14.4 K14.4@183.803,331.343
RES: P9.3 R11.2 SW1.2 U132.9 | length 52
  Top Layer w0.5: U132.9 219.456,306.578 228.346,306.578 v1(229.489,307.721) ; SW1.2@241.554,281.051 R11.2
  Top Layer w0.7: P9.3 U132.9
  Bottom Layer w0.5: v1@229.362,307.721 v1(229.489,307.721) 229.743,307.467 231.013,307.467 231.902,306.578 237.744,306.578 242.824,301.498 242.824,288.925 R11.2
SCK: NRF2.5 P9.4 U132.8 | length 17.4
  Top Layer w0.3: U132.8@218.332,307.994 218.478,307.848 222.377,307.848 224.587,310.058 NRF2.5
  Top Layer w0.7: P9.4 U132.8
VCC: C11.1 C12.2 C13.2 C1117.2 C1118.2 P9.2 P113.3 R6.1 R11.1 U5.1 U6.3 U132.10 U132.30 U132.32 | length 156
  Top Layer w0.3: C1118.2 225.374,290.195 229.743,290.195 231.267,291.719 231.267,298.577 232.918,300.228 U132.30 237.236,296.418 237.236,294.259 ; R6.1 238.506,295.529 237.236,294.259 ; R11.1 238.252,287.655 237.236,288.671 237.236,294.259
  Top Layer w0.7: v1(210.566,344.551) 210.566,344.678 213.741,347.853 U5.1 ; U5.1@218.554,347.993 U6.3 ; C12.2 C13.2 C1117.2 C1118.2
  Bottom Layer w0.3: v1@210.439,344.678 v1(210.566,344.551) 212.09,343.027 212.09,306.197 P9.2 215.773,302.514 223.774,302.514 227.33,306.07 ; C11.1 225.314,308.086 227.33,306.07 ; U132.30 232.791,300.228 231.267,301.752 231.267,305.308 ; U132.32 231.267,305.308 ; 227.33,306.07 230.505,306.07 231.267,305.308
  Bottom Layer w0.7: P113.3 212.054,360.97 216.395,356.629 U6.3
VCC(3.3V): C14.2 C15.2 C16.2 C18.1 C1119.2 NRF2.2 R7.1 U5.3 | length 136.6
  Top Layer w0.5: U5.3 246.761,342.773 251.587,337.947 251.587,292.354 249.428,290.195 244.983,290.195 243.332,291.846 240.157,291.846 239.014,292.989 R7.1
  Bottom Layer w0.5: C1119.2 224.637,329.464 229.667,324.434 NRF2.2
  Bottom Layer w1: C18.1 212.328,345.202 214.757,342.773 U5.3 220.092,342.773 C15.2 C16.2 C14.2 C1119.2
pads on no net: U6.0

## Polygon pours and split planes (outlines as drawn)
GND on Bottom Layer "Bottom Layer-No Net" (hatched 45Degree grid 0.808 track 0.403, pour order 6): 199.009,246.529 244.094,246.38 248.92,247.142 251.615,249.445 254.381,252.73 254.335,254.427 254.762,256.667 254.635,356.743 253.877,360.085 252.671,362.204 249.088,365.404 247.015,366.649 237.617,366.649 162.992,366.37 159.639,365.633 156.464,362.384 154.686,357.763 154.691,254.944 156.337,251.587 157.863,249.075 162.149,246.888 199.39,246.253
GND on Top Layer "Bottom Layer-No Net" (none, pour order 4): 217.805,246.507 243.967,246.507 246.633,246.725 249.301,247.65 251.932,249.682 253.452,251.973 254.508,253.365 254.762,256.667 254.889,263.525 254.5,357.251 253.873,360.807 251.245,363.938 247.644,366.017 244.094,366.395 163.576,366.452 159.258,365.252 156.711,362.331 154.559,358.902 154.686,342.265 154.554,256.507 154.813,254.295 155.702,251.918 157.464,249.682 159.893,247.739 163.068,246.641 217.805,246.542

## Keep-outs
Keep-Out Layer:
  lines w0.254: 154.432,257.175 154.773,254.427 155.231,252.928 155.894,251.507 158.269,248.746 160.487,247.371 162.992,246.643 167.513,246.507 245.599,246.561 248.133,247.184 250.19,248.285 251.841,249.555 252.929,251.068 253.619,252.222 254.254,253.238 254.2,253.922 254.527,255.984 254.635,260.35 254.635,264.795 254.499,357.552 253.877,360.085 252.929,361.946 249.993,364.882 246.633,366.288 240.919,366.395 163.509,366.452 159.115,364.882 156.591,362.204 155.231,360.085 154.773,358.586 154.554,356.507 154.559,354.076 154.432,257.175

## Other copper
Top Layer:
  rectangle net GND: 226.949,295.656 230.378,300.101
  text "R2T Company" at 213.614,262.509 h3
  text "RadioControl(Reciver board)" at 203.962,258.953 h3
  text "By Ehsan Shaghaei" at 210.566,255.27 h3
  text "Advisor : Hamed Jafarzadeh" at 203.962,251.587 h3
Bottom Layer:
  rectangle net GND: 228.6,315.976 231.013,318.643
  rectangle net GND: 226.949,295.656 230.378,300.101
  rectangle net GND: 247.523,269.113 250.571,300.736

## Silkscreen, mask and mechanical layers (free items; w line width, h text height)
Mechanical 1:
  lines w0.3: 154.554,356.507 154.908,359.091 155.419,360.574 156.464,362.384 158.269,364.267 160.02,365.404 162.306,366.268 163.195,366.522 244.094,366.522 246.507,366.395 247.396,366.141 248.621,365.642 249.993,364.882 251.615,363.568 252.644,362.384 253.214,361.507 253.689,360.574 253.873,359.918 254.254,358.267 254.499,357.552 254.554,256.507 254.417,254.944 254.127,253.746 253.619,252.222 252.476,250.444 251.985,249.815 251.245,249.075 250.432,248.416 249.554,247.846 248.412,247.269 247.644,246.996 246.633,246.725 245.599,246.561 244.554,246.507 173.355,246.507 169.037,246.507 164.031,246.534 161.464,246.996 159.554,247.846 158.676,248.416 157.226,249.682 156.337,250.825 155.656,251.973 155.043,253.416 154.773,254.427 154.559,256.286 154.554,356.507

## Text inside footprints (layer, text, board x,y; h text height)
B1: Top Overlay "+" at 241.505,268.394 h1.7 r180
K1: Top Overlay "NC" at 179.654,259.994 h1.5 r270; Top Overlay "NO" at 179.603,253.263 h1.5 r270; Top Overlay "COM" at 172.212,257.302 h1.5 r270
K2: Top Overlay "NC" at 195.91,259.867 h1.5 r270; Top Overlay "NO" at 195.859,253.136 h1.5 r270; Top Overlay "COM" at 188.468,257.175 h1.5 r270
K3: Top Overlay "NC" at 174.066,276.631 h1.5 r270; Top Overlay "NO" at 174.015,269.9 h1.5 r270; Top Overlay "COM" at 166.624,273.939 h1.5 r270
K4: Top Overlay "NC" at 190.703,276.25 h1.5 r270; Top Overlay "NO" at 190.652,269.519 h1.5 r270; Top Overlay "COM" at 183.261,273.558 h1.5 r270
K5: Top Overlay "NC" at 174.066,290.22 h1.5 r270; Top Overlay "NO" at 174.015,283.489 h1.5 r270; Top Overlay "COM" at 166.624,287.528 h1.5 r270
K6: Top Overlay "NC" at 190.703,289.966 h1.5 r270; Top Overlay "NO" at 190.652,283.235 h1.5 r270; Top Overlay "COM" at 183.261,287.274 h1.5 r270
K7: Top Overlay "NC" at 179.908,358.8 h1.5 r270; Top Overlay "NO" at 179.857,352.069 h1.5 r270; Top Overlay "COM" at 172.466,356.108 h1.5 r270
K8: Top Overlay "NC" at 173.939,344.957 h1.5 r270; Top Overlay "NO" at 173.888,338.226 h1.5 r270; Top Overlay "COM" at 166.497,342.265 h1.5 r270
K9: Top Overlay "NC" at 174.066,331.114 h1.5 r270; Top Overlay "NO" at 174.015,324.383 h1.5 r270; Top Overlay "COM" at 166.624,328.422 h1.5 r270
K10: Top Overlay "NC" at 174.066,317.398 h1.5 r270; Top Overlay "NO" at 174.015,310.667 h1.5 r270; Top Overlay "COM" at 166.624,314.706 h1.5 r270
K11: Top Overlay "NC" at 174.066,303.936 h1.5 r270; Top Overlay "NO" at 174.015,297.205 h1.5 r270; Top Overlay "COM" at 166.624,301.244 h1.5 r270
K12: Top Overlay "NC" at 196.418,358.927 h1.5 r270; Top Overlay "NO" at 196.367,352.196 h1.5 r270; Top Overlay "COM" at 188.976,356.235 h1.5 r270
K13: Top Overlay "NC" at 190.449,344.83 h1.5 r270; Top Overlay "NO" at 190.398,338.099 h1.5 r270; Top Overlay "COM" at 183.007,342.138 h1.5 r270
K14: Top Overlay "NC" at 190.449,331.241 h1.5 r270; Top Overlay "NO" at 190.398,324.51 h1.5 r270; Top Overlay "COM" at 183.007,328.549 h1.5 r270
K15: Top Overlay "NC" at 190.449,316.89 h1.5 r270; Top Overlay "NO" at 190.398,310.159 h1.5 r270; Top Overlay "COM" at 183.007,314.198 h1.5 r270
K16: Top Overlay "NC" at 190.703,303.428 h1.5 r270; Top Overlay "NO" at 190.652,296.697 h1.5 r270; Top Overlay "COM" at 183.261,300.736 h1.5 r270
P19: Top Overlay "1" at 246.341,321.673 h1.2; Top Overlay "2" at 248.641,321.673 h1.2; Top Overlay "7" at 246.207,309.747 h1.2; Top Overlay "8" at 248.407,309.747 h1.2
Q1: Top Overlay "3" at 200.609,272.161 h0.7 r180; Top Overlay "1" at 197.841,272.066 h0.7 r180
Q2: Top Overlay "3" at 200.482,276.987 h0.7 r180; Top Overlay "1" at 197.714,276.892 h0.7 r180
Q3: Top Overlay "3" at 200.482,281.813 h0.7 r180; Top Overlay "1" at 197.714,281.718 h0.7 r180
Q4: Top Overlay "3" at 200.482,286.258 h0.7 r180; Top Overlay "1" at 197.714,286.163 h0.7 r180
Q5: Top Overlay "3" at 200.609,290.957 h0.7 r180; Top Overlay "1" at 197.841,290.862 h0.7 r180
Q6: Top Overlay "3" at 200.482,296.291 h0.7 r180; Top Overlay "1" at 197.714,296.196 h0.7 r180
Q7: Top Overlay "3" at 200.609,300.863 h0.7 r180; Top Overlay "1" at 197.841,300.768 h0.7 r180
Q8: Top Overlay "3" at 200.355,310.134 h0.7 r180; Top Overlay "1" at 197.587,310.039 h0.7 r180
Q9: Top Overlay "3" at 200.355,319.024 h0.7 r180; Top Overlay "1" at 197.587,318.929 h0.7 r180
Q10: Top Overlay "3" at 200.482,328.549 h0.7 r180; Top Overlay "1" at 197.714,328.454 h0.7 r180
Q11: Top Overlay "3" at 200.863,337.693 h0.7 r180; Top Overlay "1" at 198.095,337.598 h0.7 r180
Q12: Top Overlay "3" at 200.482,305.435 h0.7 r180; Top Overlay "1" at 197.714,305.34 h0.7 r180
Q13: Top Overlay "3" at 200.355,314.579 h0.7 r180; Top Overlay "1" at 197.587,314.484 h0.7 r180
Q14: Top Overlay "3" at 200.355,323.596 h0.7 r180; Top Overlay "1" at 197.587,323.501 h0.7 r180
Q15: Top Overlay "3" at 200.736,332.867 h0.7 r180; Top Overlay "1" at 197.968,332.772 h0.7 r180
Q16: Top Overlay "3" at 200.736,343.154 h0.7 r180; Top Overlay "1" at 197.968,343.059 h0.7 r180